# EAGLE board ATTinyAmpDriver (EAGLE 6.4)
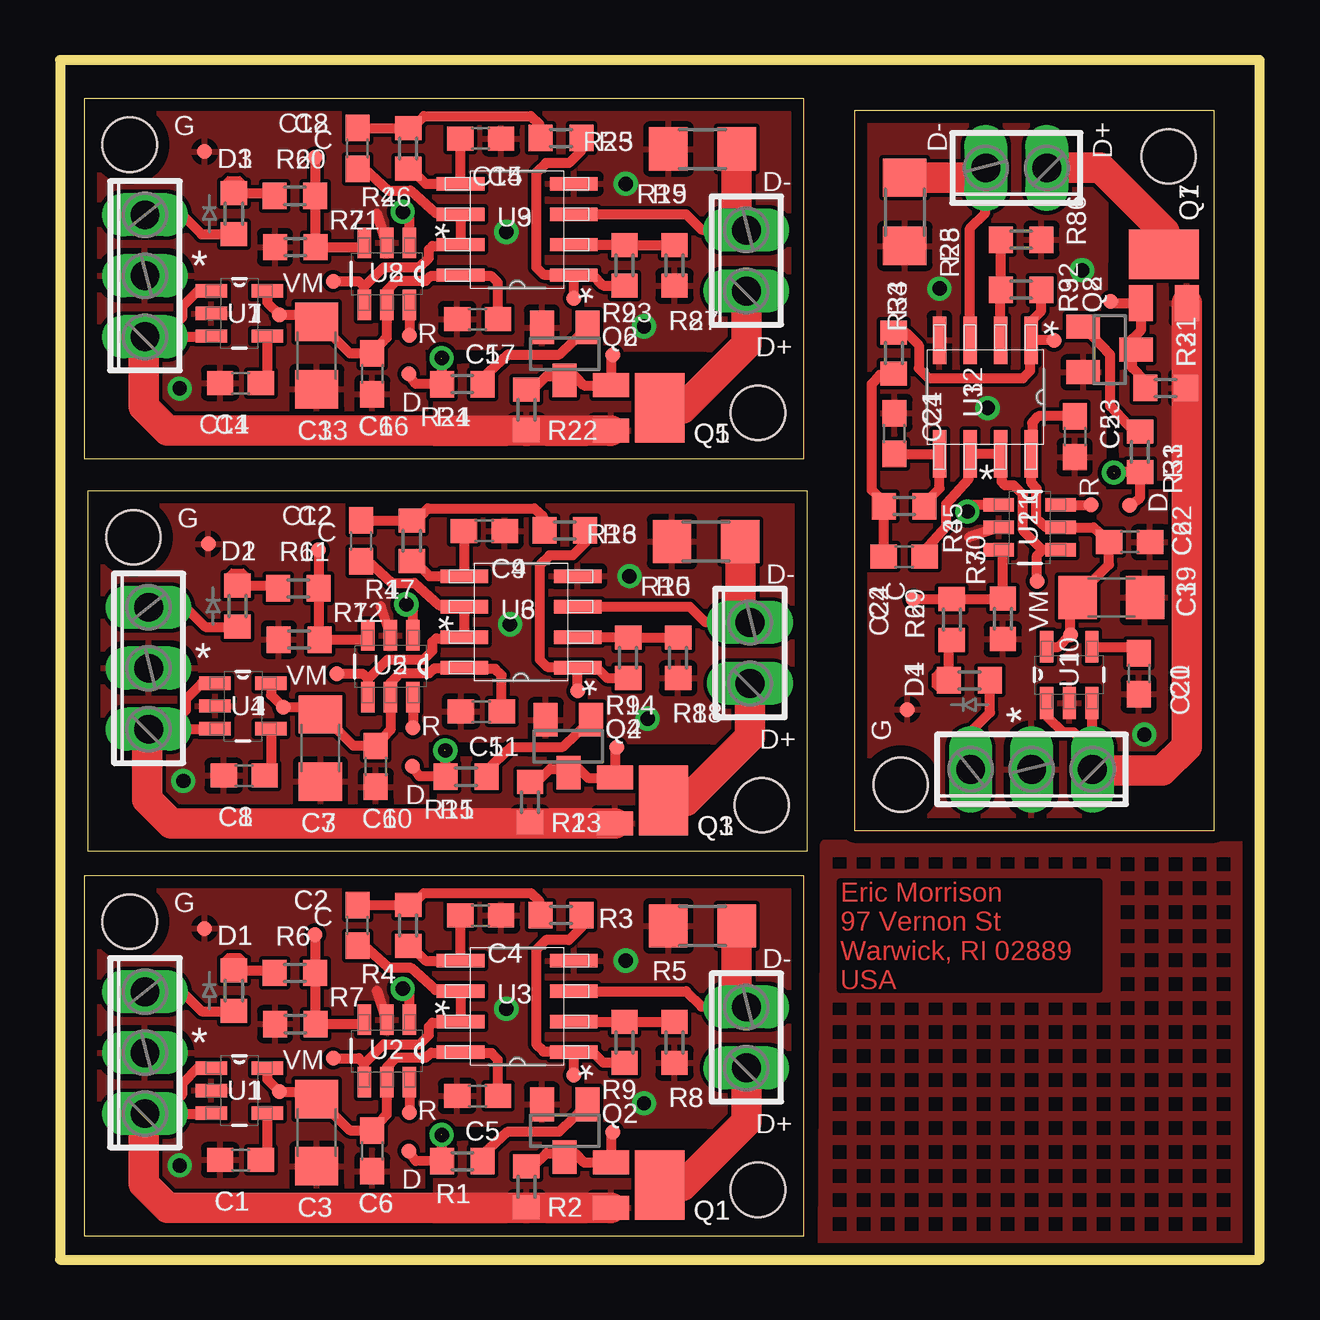
[diagram p0: board, top side]
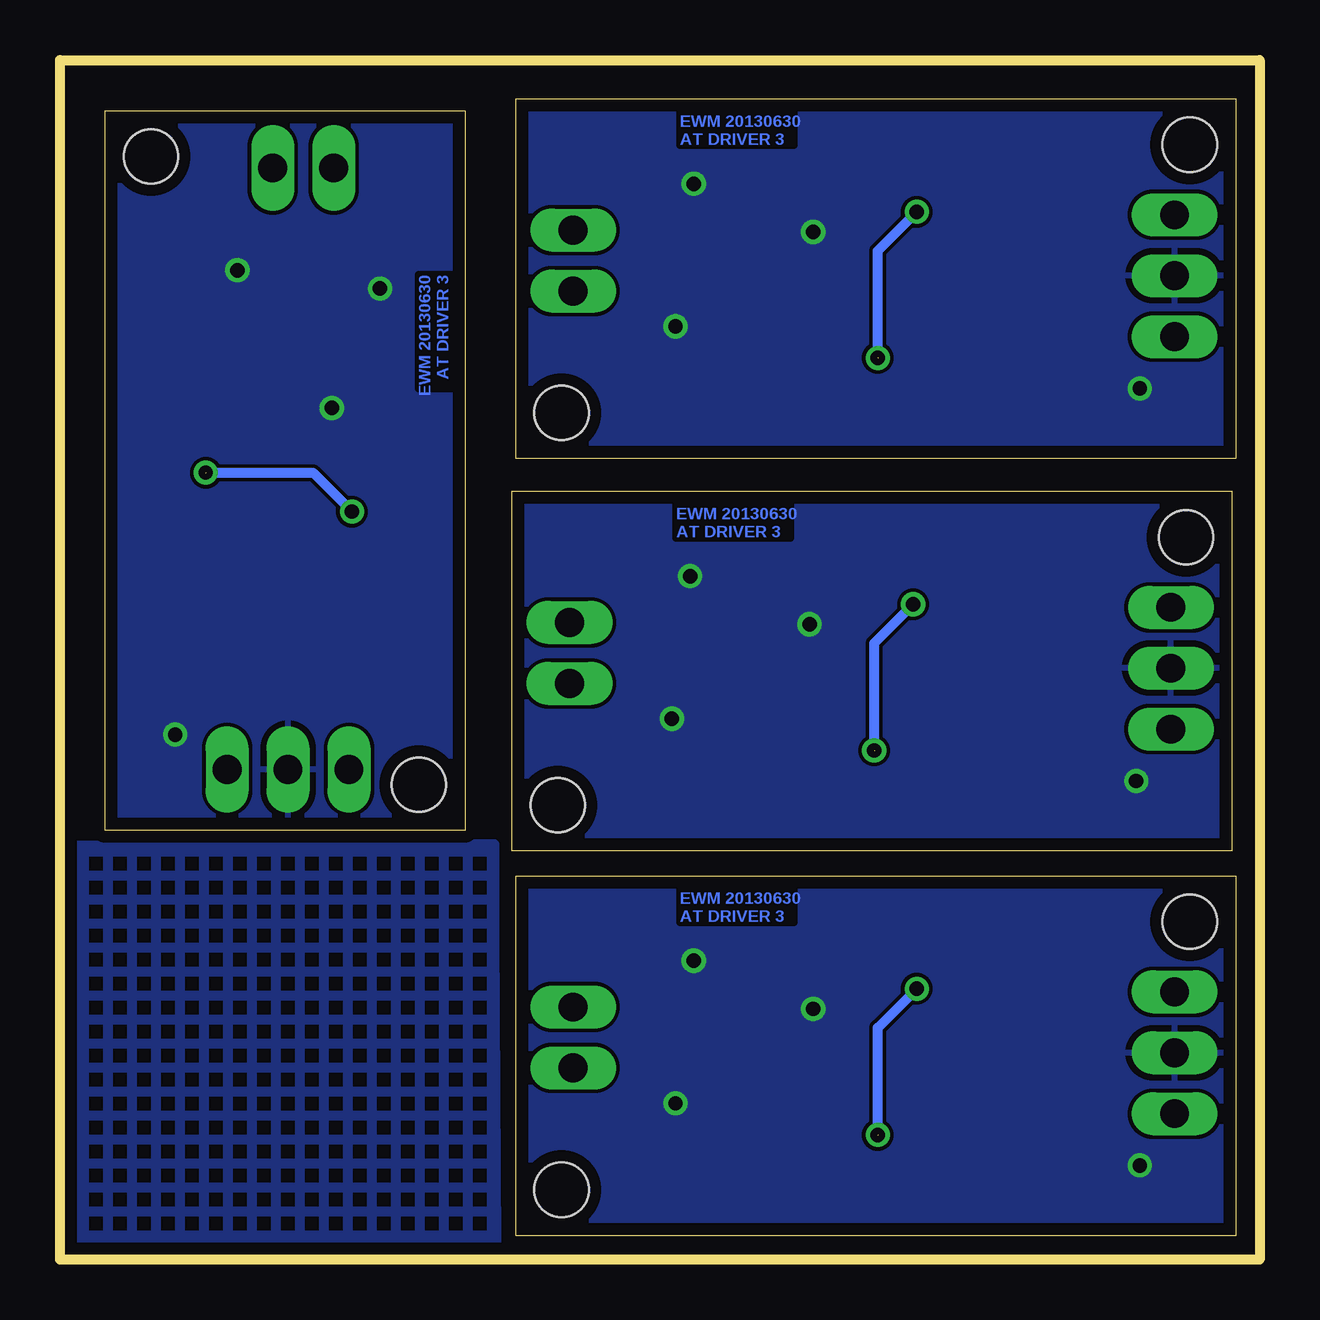
[diagram p1: board, bottom side, seen from below]

Size 50 x 50 mm. Coordinates in mm from the lower left corner, seen from the top.
Outline: 1,1 31,1 31,16 1,16 1,1
Outline: 1.15,17.03 31.15,17.03 31.15,32.03 1.15,32.03 1.15,17.03
Outline: 1,33.38 31,33.38 31,48.38 1,48.38 1,33.38
Outline: 48.12,17.89 48.12,47.89 33.12,47.89 33.12,17.89 48.12,17.89
Outline: 0,0 50,0 50,50 0,50 0,0
Copper layers (1*16): Top 0.035mm / dielectric 1.5mm / Bottom 0.035mm
Design rules "default *": minimum track width 6mil, minimum drill 10mil, track to track 6mil, track to pad 6mil, pad to pad 6mil, via to via 6mil, smd to smd 0mil, copper to edge 20mil, drill to drill 5mil, minimum pad ring 10mil, minimum via ring 8mil, stop-mask expansion 4mil, vias tented up to drill 0mil, thermal gap 10mil
Holes 2.26 mm at 2.91,14.08 29.09,2.91 3.06,30.11 29.24,18.93 2.91,46.47 29.09,35.29 35.04,19.8 46.21,45.98

## Footprints (pad centres in the part's own frame; a part is rotated, then mirrored left to right if it is on the bottom)
TPI_PAD = smd 0.635 x 0.635: P$1 0,0
C0603 = smd 1.1 x 1: 1 -0.85,0; 2 0.85,0
C1206 = smd 1.6 x 1.8: 1 -1.4,0; 2 1.4,0
D0603 = smd 1 x 1.1: 1A -0.85,0; 2C 0.85,0
SOT-23_POWER = smd 1 x 1.5: P$1 -0.95,-2.025; P$2 0.95,-2.025 | smd 2.9 x 2.05: P$3 0,0
SOT23 = smd 1 x 1.4: 1 -0.95,-1.1; 2 0.95,-1.1; 3 0,1.1
R0603 = smd 1 x 1.1: 1 -0.85,0; 2 0.85,0
R1206 = smd 1.6 x 1.803: 1 -1.422,0; 2 1.422,0
SOT95P280X145-5N = smd 1.321 x 0.559: 1 -1.168,0.94; 2 -1.168,0; 3 -1.168,-0.94; 4 1.168,-0.94; 5 1.168,0.94
SOT95P280X145-6N = smd 1.27 x 0.559: 1 -1.295,0.94; 2 -1.295,0; 3 -1.295,-0.94; 4 1.295,-0.94; 5 1.295,0; 6 1.295,0.94
SOIC8-N_MC = smd 1.981 x 0.559: 1 -2.362,1.905; 2 -2.362,0.635; 3 -2.362,-0.635; 4 -2.362,-1.905; 5 2.362,-1.905; 6 2.362,-0.635; 7 2.362,0.635; 8 2.362,1.905
2POL254 = drill 1.2 long: 1 -1.27,0; 2 1.27,0
3POL254 = drill 1.2 long: 1 -2.54,0; 2 0,0; 3 2.54,0

## Placement (x,y rotation side)
+5V  TPI  [TPI_PAD]  9.15,6.99 0 top
+5V1  TPI  [TPI_PAD]  9.31,23.02 0 top
+5V2  TPI  [TPI_PAD]  9.15,39.38 0 top
+5V3  TPI  [TPI_PAD]  42.12,26.04 90 top
C1  10n  [C0603]  7.53,4.15 180 top
C2  .1u  [C0603]  12.4,13.93 90 top
C3  47u  [C1206]  10.7,5.29 270 top
C4  .1u  [C0603]  17.54,14.34 0 top
C5  .1u  [C0603]  17.41,6.82 180 top
C6  .1u  [C0603]  13.01,4.53 270 top
C7  47u  [C1206]  10.86,21.32 270 top
C8  10n  [C0603]  7.68,20.18 180 top
C9  .1u  [C0603]  17.69,30.36 0 top
C10  .1u  [C0603]  13.17,20.56 270 top
C11  .1u  [C0603]  17.56,22.84 180 top
C12  .1u  [C0603]  12.56,29.96 90 top
C13  47u  [C1206]  10.7,37.68 270 top
C14  10n  [C0603]  7.53,36.53 180 top
C15  .1u  [C0603]  17.54,46.72 0 top
C16  .1u  [C0603]  13.01,36.92 270 top
C17  .1u  [C0603]  17.41,39.2 180 top
C18  .1u  [C0603]  12.4,46.31 90 top
C19  47u  [C1206]  43.82,27.59 0 top
C20  10n  [C0603]  44.97,24.42 270 top
C21  .1u  [C0603]  34.78,34.43 90 top
C22  .1u  [C0603]  44.59,29.91 0 top
C23  .1u  [C0603]  42.3,34.3 270 top
C24  .1u  [C0603]  35.19,29.3 180 top
D1  DIODE_0603  [D0603]  7.25,11.21 90 top
D2  DIODE_0603  [D0603]  7.4,27.24 90 top
D3  DIODE_0603  [D0603]  7.25,43.6 90 top
D4  DIODE_0603  [D0603]  37.91,24.14 180 top
DRILEGEND  [DRILEGEND]  -0.65,-13.5 0 top  (outside the outline)
GND  TPI  [TPI_PAD]  6.03,13.8 0 top
GND1  TPI  [TPI_PAD]  6.18,29.83 0 top
GND2  TPI  [TPI_PAD]  6.03,46.19 0 top
GND3  TPI  [TPI_PAD]  35.32,22.92 90 top
MEASURE  TPI  [TPI_PAD]  11.39,8.39 0 top
MEASURE1  TPI  [TPI_PAD]  11.54,24.42 0 top
MEASURE2  TPI  [TPI_PAD]  11.39,40.78 0 top
MEASURE3  TPI  [TPI_PAD]  40.73,28.28 90 top
OUTA  TPI  [TPI_PAD]  21.42,7.68 0 top
OUTA1  TPI  [TPI_PAD]  21.57,23.71 0 top
OUTA2  TPI  [TPI_PAD]  21.42,40.07 0 top
OUTA3  TPI  [TPI_PAD]  41.44,38.31 90 top
PWM  TPI  [TPI_PAD]  23.05,5.32 0 top
PWM1  TPI  [TPI_PAD]  23.2,21.35 0 top
PWM2  TPI  [TPI_PAD]  23.05,37.7 0 top
PWM3  TPI  [TPI_PAD]  43.8,39.94 90 top
Q1  SI2301CDS  [SOT-23_POWER]  25,3.11 270 top
Q2  BC846  [SOT23]  21.04,5.37 180 top
Q3  SI2301CDS  [SOT-23_POWER]  25.16,19.14 270 top
Q4  BC846  [SOT23]  21.19,21.4 180 top
Q5  SI2301CDS  [SOT-23_POWER]  25,35.49 270 top
Q6  BC846  [SOT23]  21.04,37.75 180 top
Q7  SI2301CDS  [SOT-23_POWER]  46.01,41.89 0 top
Q8  BC846  [SOT23]  43.75,37.93 270 top
R1  10k  [R0603]  16.77,4.1 0 top
R2  1k  [R0603]  19.44,3.03 90 top
R3  3.9k  [R0603]  20.89,14.36 180 top
R4  3.9k  [R0603]  14.51,13.93 270 top
R5  .1  [R1206]  26.78,13.9 0 top
R6  3.3k  [R0603]  9.79,11.95 180 top
R7  1k  [R0603]  9.81,9.81 180 top
R8  1k  [R0603]  25.61,9.05 270 top
R9  28.7K  [R0603]  23.53,9.05 90 top
R10  .1  [R1206]  26.93,29.93 0 top
R11  3.3k  [R0603]  9.94,27.97 180 top
R12  1k  [R0603]  9.97,25.84 180 top
R13  1k  [R0603]  19.59,19.06 90 top
R14  28.7K  [R0603]  23.68,25.08 90 top
R15  10k  [R0603]  16.93,20.13 0 top
R16  3.9k  [R0603]  21.04,30.39 180 top
R17  3.9k  [R0603]  14.67,29.96 270 top
R18  1k  [R0603]  25.77,25.08 270 top
R19  .1  [R1206]  26.78,46.29 0 top
R20  3.3k  [R0603]  9.79,44.33 180 top
R21  1k  [R0603]  9.81,42.2 180 top
R22  1k  [R0603]  19.44,35.42 90 top
R23  28.7K  [R0603]  23.53,41.44 90 top
R24  10k  [R0603]  16.77,36.48 0 top
R25  3.9k  [R0603]  20.89,46.75 180 top
R26  3.9k  [R0603]  14.51,46.31 270 top
R27  1k  [R0603]  25.61,41.44 270 top
R28  .1  [R1206]  35.21,43.67 90 top
R29  3.3k  [R0603]  37.17,26.68 270 top
R30  1k  [R0603]  39.3,26.7 270 top
R31  1k  [R0603]  46.09,36.33 180 top
R32  28.7K  [R0603]  40.07,40.42 180 top
R33  10k  [R0603]  45.02,33.66 90 top
R34  3.9k  [R0603]  34.76,37.78 270 top
R35  3.9k  [R0603]  35.19,31.4 0 top
R36  1k  [R0603]  40.07,42.5 0 top
RESET  TPI  [TPI_PAD]  14.56,6.13 0 top
RESET1  TPI  [TPI_PAD]  14.72,22.16 0 top
RESET2  TPI  [TPI_PAD]  14.56,38.52 0 top
RESET3  TPI  [TPI_PAD]  42.99,31.45 90 top
TPICLK  TPI  [TPI_PAD]  10.63,13.55 0 top
TPICLK1  TPI  [TPI_PAD]  10.78,29.57 0 top
TPICLK2  TPI  [TPI_PAD]  10.63,45.93 0 top
TPICLK3  TPI  [TPI_PAD]  35.57,27.52 90 top
TPIDATA  TPI  [TPI_PAD]  14.54,4.53 0 top
TPIDATA1  TPI  [TPI_PAD]  14.69,20.56 0 top
TPIDATA2  TPI  [TPI_PAD]  14.54,36.92 0 top
TPIDATA3  TPI  [TPI_PAD]  44.59,31.43 90 top
U1  SPX5205M5-L-3-3  [SOT95P280X145-5N]  7.48,7.05 0 top
U2  ATTINY5-TSHR  [SOT95P280X145-6N]  13.62,8.7 270 top
U3  MCP6L2-X_SN  [SOIC8-N_MC]  19.06,10.55 180 top
U4  SPX5205M5-L-3-3  [SOT95P280X145-5N]  7.63,23.07 0 top
U5  ATTINY5-TSHR  [SOT95P280X145-6N]  13.78,24.72 270 top
U6  MCP6L2-X_SN  [SOIC8-N_MC]  19.21,26.58 180 top
U7  SPX5205M5-L-3-3  [SOT95P280X145-5N]  7.48,39.43 0 top
U8  ATTINY5-TSHR  [SOT95P280X145-6N]  13.62,41.08 270 top
U9  MCP6L2-X_SN  [SOIC8-N_MC]  19.06,42.94 180 top
U10  SPX5205M5-L-3-3  [SOT95P280X145-5N]  42.07,24.37 90 top
U11  ATTINY5-TSHR  [SOT95P280X145-6N]  40.42,30.51 0 top
U12  MCP6L2-X_SN  [SOIC8-N_MC]  38.57,35.95 270 top
X1  DIODES  [2POL254]  28.61,9.26 90 top
X2  INPUT  [3POL254]  3.54,8.62 90 top
X3  INPUT  [3POL254]  3.69,24.65 90 top
X4  DIODES  [2POL254]  28.76,25.28 90 top
X5  INPUT  [3POL254]  3.54,41.01 90 top
X6  DIODES  [2POL254]  28.61,41.64 90 top
X7  INPUT  [3POL254]  40.5,20.43 180 top
X8  DIODES  [2POL254]  39.86,45.5 180 top

## Library data of the parts
+5V +5V1-+5V3 GND GND1-GND3 MEASURE MEASURE1-MEASURE3 OUTA OUTA1-OUTA3 PWM PWM1-PWM3 RESET RESET1-RESET3 TPICLK TPICLK1-TPICLK3 TPIDATA TPIDATA1-TPIDATA3 = Personal
C1 C8 C14 C20 = resistor; DIGIKEY: 445-1311-1-ND; DIGIKEY_COST: .10
C2 C4-C6 C9-C12 C15-C18 C21-C24 = resistor; DIGIKEY: 445-1316-1-ND; DIGIKEY_COST: .10
C3 C7 C13 C19 = resistor; DIGIKEY: 399-5508-1-ND; DIGIKEY_COST: .67
D1-D4 = Combined; DIGIKEY: 641-1002-1-ND; DIGIKEY_COST: .23
DRILEGEND = drilegend
Q1 Q3 Q5 Q7 = Combined; DIGIKEY: 568-6956-1-ND; DIGIKEY_COST: .69; NEWARK: 16P3701; NEWARK_COST: .37
Q2 Q4 Q6 Q8 = transistor-neu-to92; DIGIKEY: BC846BMTFCT-ND; DIGIKEY_COST: .17; NEWARK: 75R0728; NEWARK_COST: .14
R1 R15 R24 R33 = resistor; DIGIKEY: RMCF0603FT10K0CT-ND; DIGIKEY_COST: .04
R2 R7 R8 R12 R13 R18 R21 R22 R27 R30 R31 R36 = resistor; DIGIKEY: RMCF0603FT1K00CT-ND; DIGIKEY_COST: .04
R3 R4 R16 R17 R25 R26 R34 R35 = resistor; DIGIKEY: RMCF0603FT3K90CT-ND; DIGIKEY_COST: .04
R5 R10 R19 R28 = resistor; DIGIKEY: A103268CT-ND; DIGIKEY_COST: .13
R6 R11 R20 R29 = resistor; DIGIKEY: RMCF0603FT3K30CT-ND; DIGIKEY_COST: .04
R9 R14 R23 R32 = resistor; DIGIKEY: RMCF0603FT28R7CT-ND; DIGIKEY_COST: .04
U1 U4 U7 U10 = Exar_By_element14_Batch_1; DIGIKEY: 1016-1251-ND; DIGIKEY_COST: .60; MPN: SPX5205M5-L-3-3; OC_FARNELL: 1831954; OC_NEWARK: 23R9851; PACKAGE: SOT-23-5; SUPPLIER: EXAR
U2 U5 U8 U11 = Atmel_By_element14_Batch_1; DESCRIPTION: Microcontroller; DIGIKEY: ATTINY10-TSHRCT-ND; DIGIKEY_COST: .69; MPN: ATTINY5-TSHR; OC_FARNELL: 1841626; OC_NEWARK: 12T1342; PACKAGE: SOT563-6; SUPPLIER: ATMEL
U3 U6 U9 U12 = Combined; DIGIKEY: MCP6L2T-E/SNCT-ND; DIGIKEY_COST: .64
X1-X8 = con-phoenix-254; OC_FARNELL: unknown; OC_NEWARK: unknown

## Nets
+14V: Q1.P$2 R2.1 U1.1 U1.3 X2.1
+14V1: Q3.P$2 R13.1 U4.1 U4.3 X3.1
+14V2: Q5.P$2 R22.1 U7.1 U7.3 X5.1
+14V3: Q7.P$2 R31.1 U10.1 U10.3 X7.1
BLINK: R6.1 R7.1 TPICLK.P$1 U2.3
BLINK1: R11.1 R12.1 TPICLK1.P$1 U5.3
BLINK2: R20.1 R21.1 TPICLK2.P$1 U8.3
BLINK3: R29.1 R30.1 TPICLK3.P$1 U11.3
D-: R5.2 U3.3 X1.2
D-1: R10.2 U6.3 X4.2
D-2: R19.2 U9.3 X6.2
D-3: R28.2 U12.3 X8.2
GND: C1.2 C3.2 C4.2 C5.2 C6.2 GND.P$1 Q2.2 R5.1 R7.2 R8.2 U1.2 U2.2 U3.4 X2.2
GND1: C7.2 C8.2 C9.2 C10.2 C11.2 GND1.P$1 Q4.2 R10.1 R12.2 R18.2 U4.2 U5.2 U6.4 X3.2
GND2: C13.2 C14.2 C15.2 C16.2 C17.2 GND2.P$1 Q6.2 R19.1 R21.2 R27.2 U7.2 U8.2 U9.4 X5.2
GND3: C19.2 C20.2 C21.2 C22.2 C23.2 GND3.P$1 Q8.2 R28.1 R30.2 R36.2 U10.2 U11.2 U12.4 X7.2
INA-: R8.1 R9.2 U3.2
INA-1: R14.2 R18.1 U6.2
INA-2: R23.2 R27.1 U9.2
INA-3: R32.2 R36.1 U12.2
INB+: C4.1 R4.2 U3.5
INB+1: C9.1 R17.2 U6.5
INB+2: C15.1 R26.2 U9.5
INB+3: C21.1 R35.2 U12.5
MEASURE: C2.1 MEASURE.P$1 U2.4 U3.6 U3.7
MEASURE1: C12.1 MEASURE1.P$1 U5.4 U6.6 U6.7
MEASURE2: C18.1 MEASURE2.P$1 U8.4 U9.6 U9.7
MEASURE3: C24.1 MEASURE3.P$1 U11.4 U12.6 U12.7
MOSFET: R1.1 TPIDATA.P$1 U2.1
MOSFET1: R15.1 TPIDATA1.P$1 U5.1
MOSFET2: R24.1 TPIDATA2.P$1 U8.1
MOSFET3: R33.1 TPIDATA3.P$1 U11.1
N$1: D1.1A X2.3
N$2: C1.1 U1.4
N$3: Q1.P$3 X1.1
N$4: D1.2C R6.2
N$5: PWM.P$1 Q1.P$1 Q2.3 R2.2
N$6: Q2.1 R1.2
N$7: Q3.P$3 X4.1
N$8: C2.2 R3.2 R4.1
N$9: C8.1 U4.4
N$10: PWM1.P$1 Q3.P$1 Q4.3 R13.2
N$11: Q4.1 R15.2
N$12: C12.2 R16.2 R17.1
N$13: D2.1A X3.3
N$14: D2.2C R11.2
N$15: Q5.P$3 X6.1
N$16: C14.1 U7.4
N$17: PWM2.P$1 Q5.P$1 Q6.3 R22.2
N$18: Q6.1 R24.2
N$19: C18.2 R25.2 R26.1
N$20: D3.1A X5.3
N$21: D3.2C R20.2
N$22: Q7.P$3 X8.1
N$23: C20.1 U10.4
N$24: PWM3.P$1 Q7.P$1 Q8.3 R31.2
N$25: Q8.1 R33.2
N$26: C24.2 R34.2 R35.1
N$27: D4.1A X7.3
N$28: D4.2C R29.2
OUTA: OUTA.P$1 R3.1 R9.1 U3.1
OUTA1: OUTA1.P$1 R14.1 R16.1 U6.1
OUTA2: OUTA2.P$1 R23.1 R25.1 U9.1
OUTA3: OUTA3.P$1 R32.1 R34.1 U12.1
RESET: RESET.P$1 U2.6
RESET1: RESET1.P$1 U5.6
RESET2: RESET2.P$1 U8.6
RESET3: RESET3.P$1 U11.6
VCC: +5V.P$1 C3.1 C5.1 C6.1 U1.5 U2.5 U3.8
VCC1: +5V1.P$1 C7.1 C10.1 C11.1 U4.5 U5.5 U6.8
VCC2: +5V2.P$1 C13.1 C16.1 C17.1 U7.5 U8.5 U9.8
VCC3: +5V3.P$1 C19.1 C22.1 C23.1 U10.5 U11.5 U12.8

## Tracks (layer width: path | path; a pad name or v marks a point on that pad's centre or on a via)
+14V
  Top 0.406: X2.1 4.3,6.08 | 4.3,6.08 6.28,6.08 U1.3 | U1.1 5.75,7.99 5.09,7.33 5.09,6.87 4.3,6.08 | R2.1 19.97,2.16
  Top 1.27: Q1.P$2 19.97,2.16 4.49,2.16 3.49,3.16 3.49,6.03 X2.1
  pour Top: 15.68,4.81 17.79,4.89 20.1,4.81 31.58,4.94 31.48,0.24 15.68,0.24
+14V1
  Top 0.406: X3.1 4.45,22.11 | 4.45,22.11 6.44,22.11 U4.3 | U4.1 5.9,24.01 5.24,23.35 5.24,22.89 4.45,22.11 | R13.1 20.12,18.18 20.13,18.19
  Top 1.27: Q3.P$2 20.13,18.19 4.64,18.19 3.64,19.19 3.64,22.06 X3.1
  pour Top: 15.83,20.84 17.94,20.91 20.25,20.84 31.73,20.96 31.63,16.7 15.83,16.7
+14V2
  Top 0.406: X5.1 4.3,38.47 | 4.3,38.47 6.28,38.47 U7.3 | U7.1 5.75,40.37 5.09,39.71 5.09,39.25 4.3,38.47 | R22.1 19.97,34.54
  Top 1.27: Q5.P$2 19.97,34.54 4.49,34.54 3.49,35.54 3.49,38.41 X5.1
  pour Top: 15.68,37.2 17.79,37.27 20.1,37.2 31.58,37.32 31.48,32.62 15.68,32.62
+14V3
  Top 0.406: X7.1 43.04,21.19 | 43.04,21.19 43.04,23.17 U10.3 | U10.1 41.13,22.64 41.79,21.98 42.25,21.98 43.04,21.19 | R31.1 46.96,36.86 46.96,36.87
  Top 1.27: Q7.P$2 46.96,36.87 46.96,21.38 45.96,20.38 43.09,20.38 X7.1
  pour Top: 44.31,32.57 44.23,34.68 44.31,36.99 44.18,48.47 48.88,48.37 48.88,32.57
BLINK
  Top 0.406: 12.71,9.81 U2.3 12.68,9.81 R7.1 10.64,9.84 R6.1 TPICLK.P$1
BLINK1
  Top 0.406: 12.86,25.84 U5.3 12.84,25.84 R12.1 10.79,25.87 R11.1 10.79,29.57 TPICLK1.P$1
BLINK2
  Top 0.406: 12.71,42.2 U8.3 12.68,42.2 R21.1 10.64,42.22 R20.1 TPICLK2.P$1
BLINK3
  Top 0.406: 39.3,29.6 U11.3 39.3,29.57 R30.1 39.28,27.53 R29.1 TPICLK3.P$1
D-
  Top 0.406: U3.3 26.09,11.19 26.73,10.55 28.86,10.55 28.96,10.45 28.94,10.45 X1.2
  Top 1.27: R5.2 28.2,11.19 X1.2
D-1
  Top 0.406: U6.3 26.25,27.21 26.88,26.58 29.02,26.58 29.12,26.48 29.09,26.48 X4.2
  Top 1.27: R10.2 28.36,27.21 X4.2
D-2
  Top 0.406: U9.3 26.09,43.57 26.73,42.94 28.86,42.94 28.96,42.83 28.94,42.83 X6.2
  Top 1.27: R19.2 28.2,43.57 X6.2
D-3
  Top 0.406: U12.3 37.93,42.99 38.57,43.62 38.57,45.76 38.67,45.86 38.67,45.83 X8.2
  Top 1.27: R28.2 37.93,45.09 X8.2
GND  (via drill 0.6)
  Top 0.406: U2.2 13.22,11.21
  other vias: 4.99,3.92 18.6,10.45 23.58,12.46 24.34,6.51
  pour Top: -0.52,17.51 31.48,17.08 31.58,5.52 22.34,5.57 15.1,5.65 15.12,0.16 -0.27,-0.02
  pour Bottom: 0.23,16.5 31.3,16.5 31.25,0.57 0.27,0.47
GND1  (via drill 0.6)
  Top 0.406: U5.2 13.37,27.24
  other vias: 5.14,19.95 18.75,26.48 23.73,28.48 24.5,22.54
  pour Top: -0.37,33.97 31.63,33.97 31.73,21.55 22.49,21.6 15.25,21.68 15.27,16.62 -0.12,16.44
  pour Bottom: 0.38,32.96 31.46,32.53 31.4,17.03 0.43,16.93
GND2  (via drill 0.6)
  Top 0.406: U8.2 13.22,43.6
  other vias: 4.99,36.31 18.6,42.83 23.58,44.84 24.34,38.9
  pour Top: 0.31,48.96 31.63,49.16 31.58,37.91 22.34,37.96 15.1,38.03 15.38,32.5 0.54,32.45
  pour Bottom: 0.63,48.63 31.3,48.89 31.25,32.96 0.58,32.66
GND3  (via drill 0.6)
  Top 0.406: U11.2 37.91,30.11
  other vias: 45.2,21.88 38.67,35.49 36.66,40.47 42.61,41.23
  pour Top: 31.61,16.37 31.61,48.37 43.6,48.47 43.55,39.23 43.47,31.99 48.96,32.01 49.13,16.62
  pour Bottom: 32.61,17.12 32.61,48.2 48.54,48.14 48.64,17.16
INA-
  Top 0.406: U3.2 23.52,9.91 R9.2 R8.1
INA-1
  Top 0.406: U6.2 23.67,25.94 R14.2 R18.1
INA-2
  Top 0.406: U9.2 23.52,42.3 R23.2 R27.1
INA-3
  Top 0.406: U12.2 39.2,40.41 R32.2 R36.1
INB+
  Top 0.406: 16.66,12.49 U3.5 | C4.1 16.69,12.47 U3.5 | R4.2 14.63,13.08 15.25,12.46 U3.5
INB+1
  Top 0.406: 16.81,28.52 U6.5 | C9.1 16.84,28.5 U6.5 | R17.2 14.78,29.11 15.4,28.48 U6.5
INB+2
  Top 0.406: 16.66,44.88 U9.5 | C15.1 16.69,44.85 U9.5 | R26.2 14.63,45.46 15.25,44.84 U9.5
INB+3
  Top 0.406: 36.62,33.55 U12.5 | C21.1 36.65,33.58 U12.5 | R35.2 36.04,31.52 36.66,32.14 U12.5
MEASURE
  Top 0.406: U2.4 12.68,8.16 | 12.68,8.16 13.5,8.98 14.99,8.98 15.38,9.36 15.38,9.71 15.53,9.87 16.65,9.87 U3.7 U3.6 16.65,11.24 15.66,11.24 14.61,12.18 13.68,12.18 12.67,13.08 C2.1 | MEASURE.P$1 12.46,8.39 12.68,8.16
MEASURE1
  Top 0.406: U5.4 12.84,24.19 | 12.84,24.19 13.65,25 15.15,25 15.53,25.38 15.53,25.74 15.68,25.89 16.8,25.89 U6.7 U6.6 16.8,27.26 15.81,27.26 14.77,28.2 13.83,28.2 12.82,29.11 C12.1 | MEASURE1.P$1 12.61,24.42 12.84,24.19
MEASURE2
  Top 0.406: U8.4 12.68,40.55 | 12.68,40.55 13.5,41.36 14.99,41.36 15.38,41.74 15.38,42.1 15.53,42.25 16.65,42.25 U9.7 U9.6 16.65,43.62 15.66,43.62 14.61,44.56 13.68,44.56 12.67,45.46 C18.1 | MEASURE2.P$1 12.46,40.78 12.68,40.55
MEASURE3
  Top 0.406: U11.4 40.95,29.57 | 40.95,29.57 40.14,30.39 40.14,31.89 39.76,32.27 39.41,32.27 39.25,32.42 39.25,33.54 U12.7 U12.6 37.88,33.54 37.88,32.55 36.94,31.5 36.94,30.57 36.04,29.56 C24.1 | MEASURE3.P$1 40.73,29.35 40.95,29.57
MOSFET  (via drill 0.6)  (1 unrouted)
  Top 0.406: TPIDATA.P$1 14.83,4.11 R1.1 15.92,5.15 15.88,5.19 | U2.1 14.56,11.01 v14.28,11.29
  Bottom 0.406: v15.91,5.19 15.91,9.66 v14.28,11.29
MOSFET1  (via drill 0.6)  (1 unrouted)
  Top 0.406: TPIDATA1.P$1 14.98,20.14 R15.1 16.08,21.18 16.04,21.22 | U5.1 14.72,27.04 v14.44,27.31
  Bottom 0.406: v16.06,21.22 16.06,25.69 v14.44,27.31
MOSFET2  (via drill 0.6)  (1 unrouted)
  Top 0.406: TPIDATA2.P$1 14.83,36.5 R24.1 15.92,37.54 15.88,37.58 | U8.1 14.56,43.39 v14.28,43.67
  Bottom 0.406: v15.91,37.58 15.91,42.05 v14.28,43.67
MOSFET3  (via drill 0.6)  (1 unrouted)
  Top 0.406: TPIDATA3.P$1 45.01,31.72 R33.1 43.97,32.81 43.93,32.77 | U11.1 38.11,31.45 v37.83,31.18
  Bottom 0.406: v43.93,32.8 39.46,32.8 v37.83,31.18
N$1
  Top 0.406: X2.3 5.09,11.16 5.9,10.35 7.24,10.35 D1.1A
N$2
  Top 0.406: 8.52,3.86 C1.1 8.64,4.42 U1.4
N$3
  Top 1.27: X1.1 28.61,5.75 25.94,3.08 25.03,3.08 Q1.P$3
N$4
  Top 0.406: D1.2C 8.82,12.06 R6.2
N$5
  Top 0.406: R2.2 19.71,3.86 20.28,4.43 20.88,4.43 Q2.3 21.48,4.42 21.85,4.05 22.97,4.05 Q1.P$1 22.98,5.32 PWM.P$1
N$6
  Top 0.406: R1.2 17.62,4.37 18.68,5.34 20.81,5.34 Q2.1
N$7
  Top 1.27: X4.1 28.76,21.78 26.09,19.11 25.18,19.11 Q3.P$3
N$8
  Top 0.406: C2.2 R4.1 14.7,14.78 15.17,15.28 19.62,15.28 19.97,14.95 19.97,14.43 R3.2
N$9
  Top 0.406: 8.67,19.89 C8.1 8.8,20.45 U4.4
N$10
  Top 0.406: R13.2 19.86,19.88 20.43,20.46 21.03,20.46 Q4.3 21.63,20.45 22.01,20.07 23.12,20.07 Q3.P$1 23.13,21.34 PWM1.P$1
N$11
  Top 0.406: R15.2 17.78,20.39 18.83,21.37 20.97,21.37 Q4.1
N$12
  Top 0.406: C12.2 R17.1 14.86,30.81 15.33,31.3 19.77,31.3 20.13,30.97 20.13,30.45 R16.2
N$13
  Top 0.406: X3.3 5.24,27.19 6.05,26.38 7.39,26.38 D2.1A
N$14
  Top 0.406: D2.2C 8.98,28.09 R11.2
N$15
  Top 1.27: X6.1 28.61,38.13 25.94,35.47 25.03,35.47 Q5.P$3
N$16
  Top 0.406: 8.52,36.24 C14.1 8.64,36.8 U7.4
N$17
  Top 0.406: R22.2 19.71,36.24 20.28,36.81 20.88,36.81 Q6.3 21.48,36.81 21.85,36.43 22.97,36.43 Q5.P$1 22.98,37.7 PWM2.P$1
N$18
  Top 0.406: R24.2 17.62,36.75 18.68,37.73 20.81,37.73 Q6.1
N$19
  Top 0.406: C18.2 R26.1 14.7,47.16 15.17,47.66 19.62,47.66 19.97,47.33 19.97,46.81 R25.2
N$20
  Top 0.406: X5.3 5.09,43.55 5.9,42.73 7.24,42.73 D3.1A
N$21
  Top 0.406: D3.2C 8.82,44.45 R20.2
N$22
  Top 1.27: X8.1 43.37,45.5 46.03,42.83 46.03,41.92 Q7.P$3
N$23
  Top 0.406: 45.26,25.41 C20.1 44.7,25.54 U10.4
N$24
  Top 0.406: R31.2 45.26,36.6 44.69,37.17 44.69,37.77 Q8.3 44.7,38.37 45.07,38.74 Q7.P$1 43.8,39.87 PWM3.P$1
N$25
  Top 0.406: R33.2 44.75,34.51 43.77,35.57 43.77,37.7 Q8.1
N$26
  Top 0.406: C24.2 R35.1 34.34,31.59 33.84,32.06 33.84,36.51 34.17,36.87 34.69,36.87 R34.2
N$27
  Top 0.406: X7.3 37.96,21.98 38.77,22.79 38.77,24.13 D4.1A
N$28
  Top 0.406: D4.2C 37.06,25.72 R29.2
OUTA
  Top 0.406: R3.1 21.74,13.84 21.22,13.32 20.25,13.32 19.85,12.91 19.85,8.98 20.15,8.67 21.4,8.67 U3.1 | U3.1 22.21,8.64 22.64,8.21 23.52,8.21 R9.1 | OUTA.P$1 U3.1
OUTA1
  Top 0.406: R16.1 21.89,29.87 21.37,29.35 20.41,29.35 20,28.94 20,25 20.3,24.7 21.55,24.7 U6.1 | U6.1 22.36,24.67 22.79,24.24 R14.1 | OUTA1.P$1 U6.1
OUTA2
  Top 0.406: R25.1 21.74,46.22 21.22,45.7 20.25,45.7 19.85,45.3 19.85,41.36 20.15,41.06 21.4,41.06 U9.1 | U9.1 22.21,41.03 22.64,40.6 23.52,40.6 R23.1 | OUTA2.P$1 U9.1
OUTA3
  Top 0.406: R34.1 35.28,38.63 35.8,38.11 35.8,37.14 36.2,36.74 40.14,36.74 40.45,37.04 40.45,38.29 U12.1 | U12.1 40.47,39.1 40.9,39.53 40.9,40.41 R32.1 | OUTA3.P$1 U12.1
RESET
  Top 0.406: U2.6 RESET.P$1
RESET1
  Top 0.406: U5.6 RESET1.P$1
RESET2
  Top 0.406: U8.6 RESET2.P$1
RESET3
  Top 0.406: U11.6 RESET3.P$1
S$1
  pour Top (hatched): 35.11,17.31 49.29,17.23 49.29,0.59 31.81,0.59 31.89,13.57 31.89,17.31
  pour Bottom (hatched): 35.11,17.31 49.29,17.23 49.29,0.59 31.81,0.59 31.89,13.57 31.89,17.31
VCC
  Top 0.406: C5.1 18.26,8.33 17.99,8.59 16.75,8.59 U3.8 16.67,8.62 15.48,8.62 15.25,8.42 14.01,8.42 13.62,8.01 U2.5 13.62,6.04 C6.1 13,5.39 12.07,5.39 10.78,6.69 C3.1 10.4,6.99 +5V.P$1 8.64,7.5 U1.5
VCC1
  Top 0.406: C11.1 18.41,24.36 18.14,24.62 16.9,24.62 U6.8 16.82,24.65 15.63,24.65 15.4,24.44 14.16,24.44 13.78,24.04 U5.5 13.78,22.07 C10.1 13.15,21.42 12.23,21.42 10.93,22.72 C7.1 10.55,23.02 +5V1.P$1 8.8,23.53 U4.5
VCC2
  Top 0.406: C17.1 18.26,40.71 17.99,40.98 16.75,40.98 U9.8 16.67,41.01 15.48,41.01 15.25,40.8 14.01,40.8 13.62,40.4 U8.5 13.62,38.43 C16.1 12.07,37.78 10.78,39.08 C13.1 10.4,39.38 +5V2.P$1 8.64,39.89 U7.5
VCC3
  Top 0.406: C23.1 40.79,35.15 40.52,34.88 40.52,33.64 U12.8 40.5,33.56 40.5,32.37 40.7,32.14 40.7,30.9 41.11,30.52 U11.5 43.08,30.52 C22.1 43.72,29.89 43.72,28.96 42.42,27.67 C19.1 42.12,27.29 +5V3.P$1 41.62,25.54 U10.5

## Text on the board
Top: Eric Morrison / 97 Vernon St / Warwick, RI 02889 / USA
Bottom: EWM 20130630 / AT DRIVER 3 | EWM 20130630 / AT DRIVER 3 | EWM 20130630 / AT DRIVER 3 | EWM 20130630 / AT DRIVER 3
tNames: C | C | C | C
_tNames: C2 | G | R3 | D1 | C4 | D- | D+ | R6 | R5 | D- | R4 | R7 | U3 | R5 | Q1 | R8 | U2 | R3 | V | M | U1 | R9 | R8 | R9 | Q2 | R | Q2 | D+ | C5 | R2 | R1 | C4 | C1 | D | U3 | C3 | C6 | R2 | Q1 | C5 | R1 | R | G | C2 | R3 | D | D1 | U2 | R6 | C4 | R4 | C6 | R4 | R5 | D- | C2 | R7 | R7 | U3 | M | C3 | R6 | V | D1 | C1 | V | M | U2 | U1 | U1 | R9 | R | Q2 | R8 | G | C5 | D+ | C1 | D | R1 | C3 | C6 | R2 | Q1 | C2 | R3 | G | D1 | R6 | C4 | R4 | R5 | D- | R7 | U3 | V | M | U2 | U1 | R9 | R | Q2 | R8 | C5 | D+ | C1 | D | R1 | C3 | C6 | R2 | Q1